# EAGLE board I2CRJ45X8 (EAGLE 9.5.0)
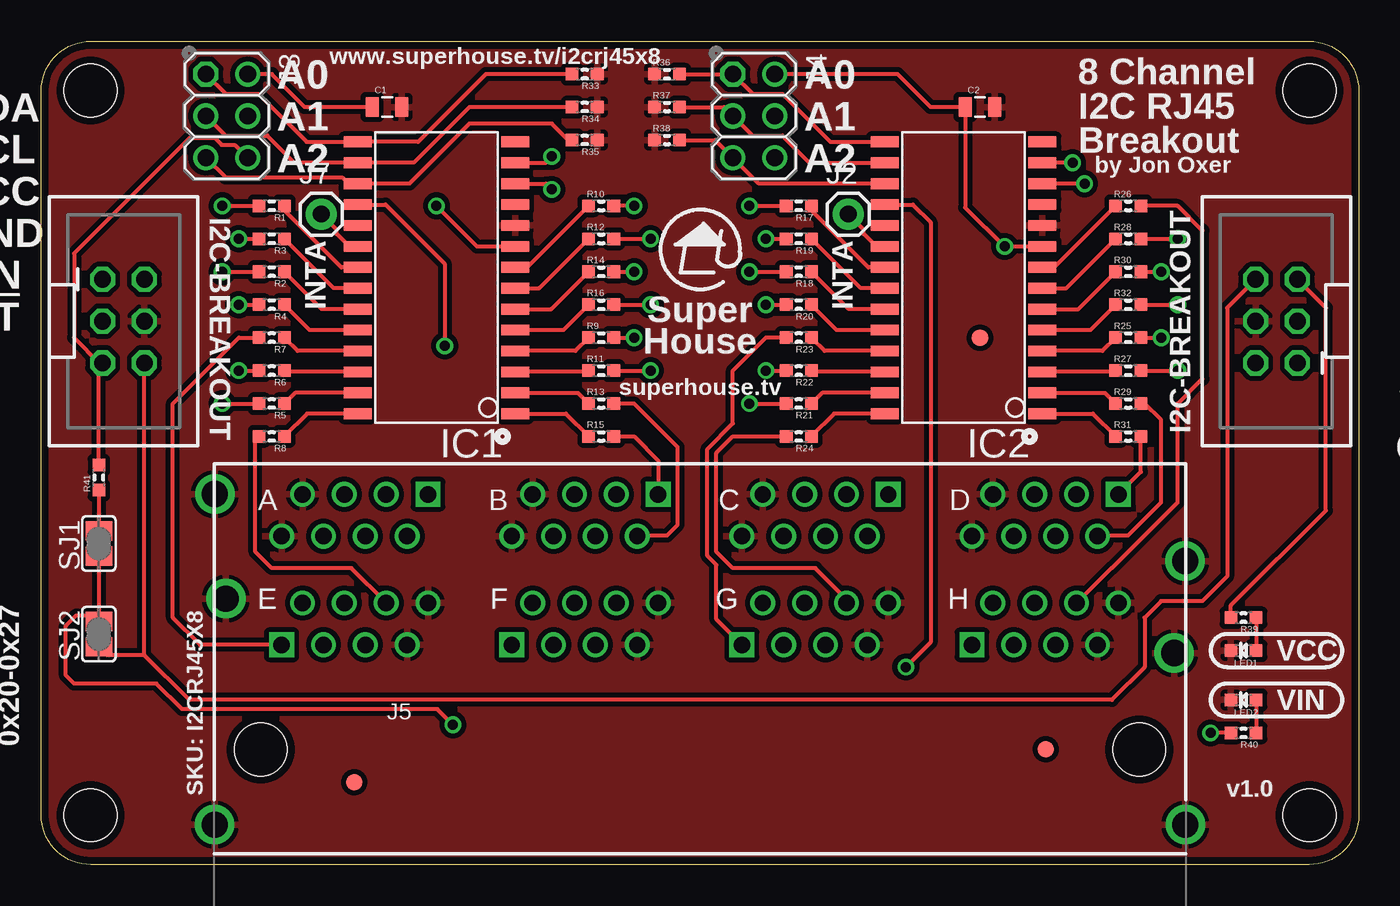
[diagram p0: board, top side]
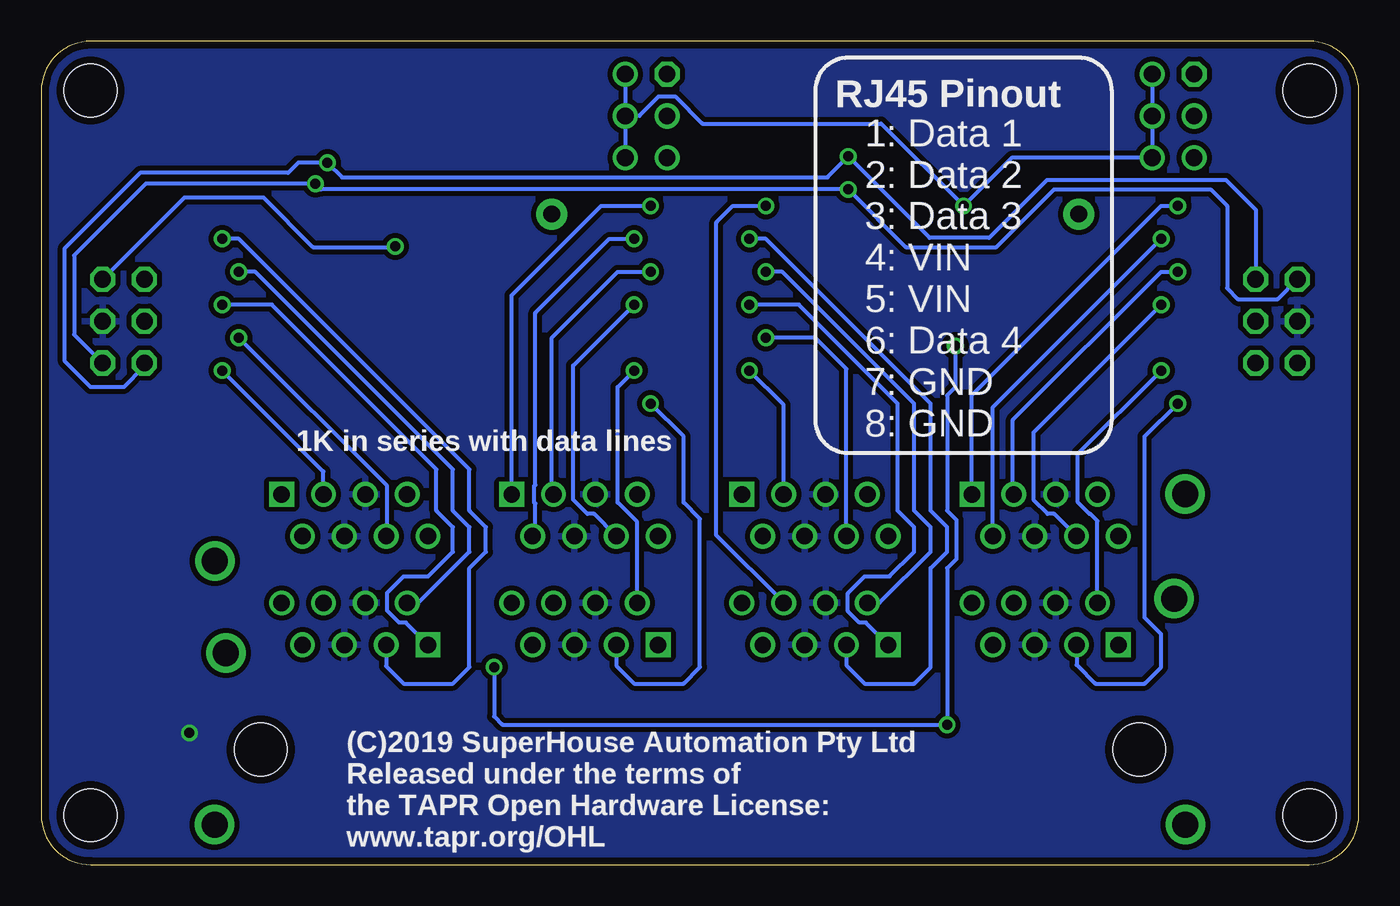
[diagram p1: board, bottom side, seen from below]

Size 80 x 50 mm. Coordinates in mm from the lower left corner, seen from the top.
Outline: 3,0 arc-90 0,3 0,47 arc-90 3,50 77,50 arc-90 80,47 80,3 arc-90 77,0 3,0
Copper layers (1*16): Top 0.035mm / dielectric 1.5mm / Bottom 0.035mm
Design rules "default *": minimum track width 10mil, minimum drill 24mil, track to track 12mil, track to pad 12mil, pad to pad 12mil, via to via 12mil, smd to smd 8mil, copper to edge 18mil, drill to drill 8mil, minimum pad ring 10mil, minimum via ring 8mil, stop-mask expansion 4mil, vias tented up to drill 25mil, thermal gap 10mil
Holes 3.2 mm at 3,3 77,3 77,47 3,47

## Footprints (pad centres in the part's own frame; a part is rotated, then mirrored left to right if it is on the bottom)
C0805 = smd 0.8 x 1.2: 1 -0.9,0; 2 0.9,0
FIDUCIAL-1X2.5 = smd 1 x 1: 1 0,0
SO28W = smd 0.65 x 1.7: 1 -7.62,-4.78; 2 -6.35,-4.78; 3 -5.08,-4.78; 4 -3.81,-4.78; 5 -2.54,-4.78; 6 -1.27,-4.78; 7 0,-4.78; 8 1.27,-4.78; 9 2.54,-4.78; 10 3.81,-4.78; 11 5.08,-4.78; 12 6.35,-4.78; 13 7.62,-4.78; 14 8.89,-4.78; 15 8.89,4.78; 16 7.62,4.78; 17 6.35,4.78; 18 5.08,4.78; 19 3.81,4.78; 20 2.54,4.78; 21 1.27,4.78; 22 0,4.78; 23 -1.27,4.78; 24 -2.54,4.78; 25 -3.81,4.78; 26 -5.08,4.78; 27 -6.35,4.78; 28 -7.62,4.78
2X03-SHROUDED = drill 1.016 octagon: 1 -1.27,2.54; 2 1.27,2.54; 3 -1.27,0; 4 1.27,0; 5 -1.27,-2.54; 6 1.27,-2.54
1X01 = drill 1.016 pad 1.88: 1 0,0
2X03-P = drill 1.016 octagon: 1 0,0 | drill 1.016: 2 0,2.54; 3 2.54,0; 4 2.54,2.54; 5 5.08,0; 6 5.08,2.54
RJ45-2X4 = drill 1 square: A1 -16.51,15.49; B1 -2.54,15.49; C1 11.43,15.49; D1 25.4,15.49; E1 -25.4,6.35; F1 -11.43,6.35; G1 2.54,6.35; H1 16.51,6.35 | drill 1: A2 -17.78,12.95; A3 -19.05,15.49; A4 -20.32,12.95; A5 -21.59,15.49; A6 -22.86,12.95; A7 -24.13,15.49; A8 -25.4,12.95; B2 -3.81,12.95; B3 -5.08,15.49; B4 -6.35,12.95; B5 -7.62,15.49; B6 -8.89,12.95; B7 -10.16,15.49; B8 -11.43,12.95; C2 10.16,12.95; C3 8.89,15.49; C4 7.62,12.95; C5 6.35,15.49; C6 5.08,12.95; C7 3.81,15.49; C8 2.54,12.95; D2 24.13,12.95; D3 22.86,15.49; D4 21.59,12.95; D5 20.32,15.49; D6 19.05,12.95; D7 17.78,15.49; D8 16.51,12.95; E2 -24.13,8.89; E3 -22.86,6.35; E4 -21.59,8.89; E5 -20.32,6.35; E6 -19.05,8.89; E7 -17.78,6.35; E8 -16.51,8.89; F2 -10.16,8.89; F3 -8.89,6.35; F4 -7.62,8.89; F5 -6.35,6.35; F6 -5.08,8.89; F7 -3.81,6.35; F8 -2.54,8.89; G2 3.81,8.89; G3 5.08,6.35; G4 6.35,8.89; G5 7.62,6.35; G6 8.89,8.89; G7 10.16,6.35; G8 11.43,8.89; H2 17.78,8.89; H3 19.05,6.35; H4 20.32,8.89; H5 21.59,6.35; H6 22.86,8.89; H7 24.13,6.35; H8 25.4,8.89 | drill 1.6: GND0 29.464,-4.572; GND1 28.79,5.85; GND2 -29.46,15.5; GND3 -28.79,9.15; GND4 -29.464,-4.572; GND5 29.46,11.43 | hole 3.2: 26.67,0; -26.67,0
LED-0603 = smd 0.762 x 0.762: A -0.762,0; C 0.762,0
R0603 = smd 0.762 x 0.762: 1 -0.762,0; 2 0.762,0
SJ = smd 1.168 x 1.6: 1 -0.762,0; 2 0.762,0
SJC = smd 1.168 x 1.6: 1 -0.762,0; 2 0.762,0

## Placement (x,y rotation side)
C1  10uF  [C0805]  21,46 0 top
C2  10uF  [C0805]  57,46 0 top
FID1  FIDUCIAL1X2.5  [FIDUCIAL-1X2.5]  61,7 0 top
FID2  FIDUCIAL1X2.5  [FIDUCIAL-1X2.5]  19,5 0 top
FID3  FIDUCIAL1X2.5  [FIDUCIAL-1X2.5]  57,32 0 top
IC1  MCP23017SO  [SO28W]  24,35 90 top
IC2  MCP23017SO  [SO28W]  56,35 90 top
J1  M02X3-SHROUDED  [2X03-SHROUDED]  75,33 180 top
J2  INT2A  [1X01]  49,39.5 0 top
J3  M02X3-PIN  [2X03-P]  10,48 270 top
J4  M02X3-PIN  [2X03-P]  42,48 270 top
J5  RJ45-X8  [RJ45-2X4]  40,7 0 top
J6  M02X3-SHROUDED  [2X03-SHROUDED]  5,33 0 top
J7  INT1A  [1X01]  17,39.5 0 top
LED1  BLUE  [LED-0603]  73,13 180 top
LED2  GREEN  [LED-0603]  73,10 180 top
R1  1K  [R0603]  14,40 180 top
R2  1K  [R0603]  14,36 180 top
R3  1K  [R0603]  14,38 180 top
R4  1K  [R0603]  14,34 180 top
R5  1K  [R0603]  14,28 180 top
R6  1K  [R0603]  14,30 180 top
R7  1K  [R0603]  14,32 180 top
R8  1K  [R0603]  14,26 180 top
R9  1K  [R0603]  34,32 0 top
R10  1K  [R0603]  34,40 0 top
R11  1K  [R0603]  34,30 0 top
R12  1K  [R0603]  34,38 0 top
R13  1K  [R0603]  34,28 0 top
R14  1K  [R0603]  34,36 0 top
R15  1K  [R0603]  34,26 0 top
R16  1K  [R0603]  34,34 0 top
R17  1K  [R0603]  46,40 180 top
R18  1K  [R0603]  46,36 180 top
R19  1K  [R0603]  46,38 180 top
R20  1K  [R0603]  46,34 180 top
R21  1K  [R0603]  46,28 180 top
R22  1K  [R0603]  46,30 180 top
R23  1K  [R0603]  46,32 180 top
R24  1K  [R0603]  46,26 180 top
R25  1K  [R0603]  66,32 0 top
R26  1K  [R0603]  66,40 0 top
R27  1K  [R0603]  66,30 0 top
R28  1K  [R0603]  66,38 0 top
R29  1K  [R0603]  66,28 0 top
R30  1K  [R0603]  66,36 0 top
R31  1K  [R0603]  66,26 0 top
R32  1K  [R0603]  66,34 0 top
R33  10K  [R0603]  33,48 180 top
R34  10K  [R0603]  33,46 180 top
R35  10K  [R0603]  33,44 180 top
R36  10K  [R0603]  38,48 0 top
R37  10K  [R0603]  38,46 0 top
R38  10K  [R0603]  38,44 0 top
R39  10K  [R0603]  73,15 180 top
R40  10K  [R0603]  73,8 180 top
R41  10K  [R0603]  3.5,23.5 90 top
SJ1  [SJ]  3.5,19.5 90 top
SJ2  SJC-NORMAL  [SJC]  3.5,14 90 top

## Library data of the parts
C1 C2 R1-R41 = SuperHouse-DiscreteSemi
FID1-FID3 = SuperHouse-Symbols
IC1 IC2 = SuperHouse-ICs
J1-J7 = SuperHouse-Connectors
LED1 LED2 = SuperHouse-LEDs
SJ1 SJ2 = SuperHouse-Jumpers

## Nets
!RESET: J1.6 J6.6 SJ2.1
!RST: IC1.18 IC2.18 SJ1.1 SJ2.2
A1: J5.A1 R1.2
A2: J5.A2 R3.2
A3: J5.A3 R2.2
A6: J5.A6 R4.2
B1: J5.B1 R15.2
B2: J5.B2 R13.2
B3: J5.B3 R11.2
B6: J5.B6 R9.2
C1: J5.C1 R17.2
C2: J5.C2 R19.2
C3: J5.C3 R18.2
C6: J5.C6 R20.2
D1: J5.D1 R31.2
D2: J5.D2 R29.2
D3: J5.D3 R27.2
D6: J5.D6 R25.2
E1: J5.E1 R7.2
E2: J5.E2 R6.2
E3: J5.E3 R5.2
E6: J5.E6 R8.2
F1: J5.F1 R16.2
F2: J5.F2 R14.2
F3: J5.F3 R12.2
F6: J5.F6 R10.2
G1: J5.G1 R23.2
G2: J5.G2 R22.2
G3: J5.G3 R21.2
G6: J5.G6 R24.2
GND: C1.2 C2.2 IC1.10 IC2.10 J1.4 J5.A7 J5.A8 J5.B7 J5.B8 J5.C7 J5.C8 J5.D7 J5.D8 J5.E7 J5.E8 J5.F7 J5.F8 J5.G7 J5.G8 J5.GND0 J5.GND1 J5.GND2 J5.GND3 J5.GND4 J5.GND5 J5.H7 J5.H8 J6.4 LED1.C LED2.C R33.1 R34.1 R35.1 R36.1 R37.1 R38.1
GPA0: IC1.21 R1.1
GPA0-2: IC2.21 R17.1
GPA1: IC1.22 R3.1
GPA1-2: IC2.22 R19.1
GPA2: IC1.23 R2.1
GPA2-2: IC2.23 R18.1
GPA3: IC1.24 R4.1
GPA3-2: IC2.24 R20.1
GPA4: IC1.25 R7.1
GPA4-2: IC2.25 R23.1
GPA5: IC1.26 R6.1
GPA5-2: IC2.26 R22.1
GPA6: IC1.27 R5.1
GPA6-2: IC2.27 R21.1
GPA7: IC1.28 R8.1
GPA7-2: IC2.28 R24.1
GPB0: IC1.1 R15.1
GPB0-2: IC2.1 R31.1
GPB1: IC1.2 R13.1
GPB1-2: IC2.2 R29.1
GPB2: IC1.3 R11.1
GPB2-2: IC2.3 R27.1
GPB3: IC1.4 R9.1
GPB3-2: IC2.4 R25.1
GPB4: IC1.5 R16.1
GPB4-2: IC2.5 R32.1
GPB5: IC1.6 R14.1
GPB5-2: IC2.6 R30.1
GPB6: IC1.7 R12.1
GPB6-2: IC2.7 R28.1
GPB7: IC1.8 R10.1
GPB7-2: IC2.8 R26.1
H1: J5.H1 R32.2
H2: J5.H2 R30.2
H3: J5.H3 R28.2
H6: J5.H6 R26.2
N$1: IC2.16 J4.3 R37.2
N$2: IC1.17 J3.5 R35.2
N$3: IC1.16 J3.3 R34.2
N$4: IC1.15 J3.1 R33.2
N$5: IC2.15 J4.1 R36.2
N$6: IC2.17 J4.5 R38.2
N$7: LED1.A R39.1
N$8: LED2.A R40.1
N$9: IC2.20 J2.1
N$10: IC1.20 J7.1
N$14: R41.1 SJ1.2
SCL: IC1.12 IC2.12 J1.1 J6.1
SDA: IC1.13 IC2.13 J1.2 J6.2
VCC: C1.1 C2.1 IC1.9 IC2.9 J1.5 J3.2 J3.4 J3.6 J4.2 J4.4 J4.6 J6.5 R39.2 R41.2
VIN: J1.3 J5.A4 J5.A5 J5.B4 J5.B5 J5.C4 J5.C5 J5.D4 J5.D5 J5.E4 J5.E5 J5.F4 J5.F5 J5.G4 J5.G5 J5.H4 J5.H5 J6.3 R40.2

## Tracks (layer width: path | path; a pad name or v marks a point on that pad's centre or on a via)
!RESET
  Top 0.254: J1.6 72,33.81 72,17.5 70.5,16 68,16 67,15 67,12 65,10 9,10 6.27,12.73 | 6.27,12.73 J6.6 | SJ2.1 4.01,12.73 6.27,12.73
!RST  (via drill 0.61)
  Top 0.254: SJ1.1 3.5,15.14 | 3.5,15.14 SJ2.2 | IC1.18 20.92,40.08 24.5,36.5 v24.5,31.5 | v25,8.5 24.06,9.44 8.56,9.44 7,11 2,11 1.5,11.5 1.5,14.5 2.14,15.14 3.5,15.14 | IC2.18 52.92,40.08 54,39 54,13.5 v52.5,12
  Bottom 0.254: v24.5,31.5 24.5,29 25,28.5 25,21.5 24.44,20.94 24.44,18.56 25,18 v25,8.5 52,8.5 52.5,9 v52.5,12
A1  (via drill 0.61)
  Top 0.254: v11,40 R1.2
  Bottom 0.254: J5.A1 23.49,28.51 12,40 v11,40
A2  (via drill 0.61)
  Top 0.254: v12,38 R3.2
  Bottom 0.254: J5.A2 22.22,27.78 v12,38
A3  (via drill 0.61)
  Top 0.254: v11,36 R2.2
  Bottom 0.254: J5.A3 21,22.54 21,27 12,36 v11,36
A6  (via drill 0.61)
  Top 0.254: v12,34 R4.2
  Bottom 0.254: J5.A6 18.49,21.3 18.9,21.3 19.76,22.17 19.76,26.24 v12,34
B1
  Top 0.254: R15.2 36,26 37.46,24.54 J5.B1
B2
  Top 0.254: J5.B2 36.24,20 38,20 38.65,20.65 38.65,25.35 36,28 R13.2
B3  (via drill 0.61)
  Top 0.254: R11.2 v37,30
  Bottom 0.254: J5.B3 34.92,27.92 v37,30
B6  (via drill 0.61)
  Top 0.254: R9.2 v36,32
  Bottom 0.254: J5.B6 31.11,30.11 33,32 v36,32
C1  (via drill 0.61)
  Top 0.254: v43,40 R17.2
  Bottom 0.254: J5.C1 51.43,34.57 46,40 v43,40
C2  (via drill 0.61)
  Top 0.254: v44,38 R19.2
  Bottom 0.254: J5.C2 50,20.11 50,21.92 50.08,22 50.08,22.98 50,23.06 50,33.5 45.5,38 v44,38
C3  (via drill 0.61)
  Top 0.254: v43,36 R18.2
  Bottom 0.254: J5.C3 49,22.6 49,32 45,36 v43,36
C6  (via drill 0.61)
  Top 0.254: v44,34 R20.2
  Bottom 0.254: J5.C6 46.43,21.3 46.84,21.3 47.7,22.17 47.7,30.3 v44,34
D1
  Top 0.254: J5.D1 66.76,23.85 R31.2
D2
  Top 0.254: J5.D2 64.18,20 66,20 68,22 68,27 67,28 R29.2
D3  (via drill 0.61)
  Top 0.254: R27.2 v69,30
  Bottom 0.254: J5.D3 62.86,23.86 v69,30
D6  (via drill 0.61)
  Top 0.254: R25.2 v68,32
  Bottom 0.254: J5.D6 59,20 59,23 v68,32
E1
  Top 0.254: J5.E1 9.65,13.35 8,15 8,28 12,32 R7.2
E2  (via drill 0.61)
  Top 0.254: v12,30 R6.2
  Bottom 0.254: J5.E2 15.87,20.87 16.3,21.3 16.36,21.3 17.06,22 17.06,24.94 v12,30
E3  (via drill 0.61)
  Top 0.254: v11,28 R5.2
  Bottom 0.254: J5.E3 17.14,12.14 16,11 13,11 12,12 12,14 13,15 13,26 v11,28
E6
  Top 0.254: J5.E6 18.84,18 14,18 13,19 13,25.76 R8.2
F1  (via drill 0.61)
  Top 0.254: R16.2 v37,34
  Bottom 0.254: J5.F1 29.92,14.7 30.33,14.7 31.03,15.4 31.03,16.47 30,17.5 28.5,17.5 27,19 27,20.5 28,21.5 28,28 34,34 v37,34
F2  (via drill 0.61)
  Top 0.254: R14.2 v36,36
  Bottom 0.254: J5.F2 29.11,15.89 26,19 26,20.5 27,21.5 27,28 35,36 v36,36
F3  (via drill 0.61)
  Top 0.254: R12.2 v37,38
  Bottom 0.254: J5.F3 31.11,12.11 30,11 27,11 26,12 26,18 25,19 25,20.5 26,21.5 26,28 36,38 v37,38
F6  (via drill 0.61)
  Top 0.254: v36,40 R10.2
  Bottom 0.254: J5.F6 34.92,15.92 39,20 39,39 38,40 v36,40
G1
  Top 0.254: R23.2 44,32 42,30 42,26.79 40.44,25.23 40.44,18.77 41,18.21 41,14.89 J5.G1
G2  (via drill 0.61)
  Top 0.254: v44,30 R22.2
  Bottom 0.254: J5.G2 43.81,20.81 45,22 45,29 v44,30
G3  (via drill 0.61)
  Top 0.254: v43,28 R21.2
  Bottom 0.254: J5.G3 45.08,12.08 44,11 41,11 40,12 40,21 41,22 41,26 v43,28
G6
  Top 0.254: J5.G6 48.89,16.11 47,18 42,18 41,19 41,25 42,26 R24.2
GND
  pour Top: 77,0 arc90 80,3 80,47 arc90 77,50 3,50 arc90 0,47 0,3 arc90 3,0
GPA0
  Top 0.254: IC1.21 18.23,36.27 14.76,39.74 R1.1
GPA0-2
  Top 0.254: IC2.21 50.23,36.27 46.76,39.74 R17.1
GPA1
  Top 0.254: IC1.22 17.76,35 R3.1
GPA1-2
  Top 0.254: IC2.22 49.76,35 R19.1
GPA2
  Top 0.254: IC1.23 17.03,33.73 R2.1
GPA2-2
  Top 0.254: IC2.23 49.03,33.73 R18.1
GPA3
  Top 0.254: R4.1 16.3,32.46 IC1.24
GPA3-2
  Top 0.254: R20.1 48.3,32.46 IC2.24
GPA4
  Top 0.254: R7.1 15.57,31.19 IC1.25
GPA4-2
  Top 0.254: R23.1 47.57,31.19 IC2.25
GPA5
  Top 0.254: IC1.26 14.84,29.92 R6.1
GPA5-2
  Top 0.254: IC2.26 46.84,29.92 R22.1
GPA6
  Top 0.254: IC1.27 15.41,28.65 R5.1
GPA6-2
  Top 0.254: IC2.27 47.41,28.65 R21.1
GPA7
  Top 0.254: IC1.28 16.14,27.38 R8.1
GPA7-2
  Top 0.254: IC2.28 48.14,27.38 R24.1
GPB0
  Top 0.254: IC1.1 31.86,27.38 R15.1
GPB0-2
  Top 0.254: IC2.1 63.86,27.38 R31.1
GPB1
  Top 0.254: IC1.2 32.59,28.65 R13.1
GPB1-2
  Top 0.254: IC2.2 64.59,28.65 R29.1
GPB2
  Top 0.254: R11.1 33.16,29.92 IC1.3
GPB2-2
  Top 0.254: R27.1 65.16,29.92 IC2.3
GPB3
  Top 0.254: R9.1 32.43,31.19 IC1.4
GPB3-2
  Top 0.254: R25.1 64.43,31.19 IC2.4
GPB4
  Top 0.254: R16.1 31.7,32.46 IC1.5
GPB4-2
  Top 0.254: R32.1 63.7,32.46 IC2.5
GPB5
  Top 0.254: IC1.6 30.97,33.73 R14.1
GPB5-2
  Top 0.254: IC2.6 62.97,33.73 R30.1
GPB6
  Top 0.254: IC1.7 30.24,35 R12.1
GPB6-2
  Top 0.254: IC2.7 62.24,35 R28.1
GPB7
  Top 0.254: IC1.8 29.51,36.27 R10.1
GPB7-2
  Top 0.254: IC2.8 61.51,36.27 R26.1
H1  (via drill 0.61)
  Top 0.254: R32.2 v69,34
  Bottom 0.254: J5.H1 57.86,14.7 58.27,14.7 59,15.43 59,16.5 58,17.5 56.5,17.5 55,19 55,20.5 56,21.5 56,24 66,34 v69,34
H2  (via drill 0.61)
  Top 0.254: R30.2 v68,36
  Bottom 0.254: J5.H2 57.11,15.89 54,19 54,20.5 55,21.5 55,24 67,36 v68,36
H3  (via drill 0.61)
  Top 0.254: R28.2 v69,38
  Bottom 0.254: J5.H3 59.05,12.05 58,11 55,11 54,12 54,18 53,19 53,20.5 54,21.5 54,24 68,38 v69,38
H6
  Top 0.254: J5.H6 64.97,18 65,18 69,22 69,28 70.5,29.5 70.5,38.5 69,40 R26.2
N$1
  Top 0.254: IC2.16 46.65,42.62 45,44.27 43.19,44.27 J4.3 41.46,46 R37.2
N$2
  Top 0.254: R35.2 32,44 31,45 26,45 22.35,41.35 IC1.17 18.65,41.35 18.27,41.73 11.19,41.73 J3.5
N$3
  Top 0.254: J3.3 11.19,44.27 13.73,44.27 15.38,42.62 IC1.16 22.62,42.62 26,46 R34.2
N$4
  Top 0.254: J3.1 11.19,46.81 13.19,46.81 16.11,43.89 IC1.15 22.89,43.89 27,48 R33.2
N$5
  Top 0.254: IC2.15 47.92,43.89 45,46.81 43.19,46.81 J4.1 R36.2
N$6
  Top 0.254: IC2.17 43.57,41.35 J4.5 40.92,44 R38.2
N$7
  Top 0.254: R39.1 LED1.A
N$8
  Top 0.254: LED2.A R40.1
N$9
  Top 0.254: IC2.20 50.7,37.54 49.94,38.31 49.94,38.56 J2.1
N$10
  Top 0.254: J7.1 17.94,38.56 17.94,38.31 18.7,37.54 IC1.20
N$14
  Top 0.254: R41.1 SJ1.2
SCL  (via drill 0.61)
  Top 0.254: v63.35,41.35 IC2.12 | IC1.12 30.65,41.35 v31,41
  Bottom 0.254: J1.1 78,32.19 78,37 73.65,41.35 v63.35,41.35 63,41 v31,41 27.5,37.5 22,37.5 19.5,40 18.5,41 9,41 8,40 8,35 7.35,34.35 4.92,34.35 J6.1
SDA  (via drill 0.61)
  Top 0.254: v62.62,42.62 IC2.13 | IC1.13 30.62,42.62 v31,43
  Bottom 0.254: J1.2 73.73,30.27 75,29 77,29 78.56,30.56 78.56,37.44 74,42 65,42 64.38,42.62 v62.62,42.62 61.73,41.73 32.27,41.73 v31,43 26.06,38.06 22.44,38.06 18.94,41.56 8.06,41.56 6.27,39.77 J6.2
VCC  (via drill 0.61)
  Top 0.254: IC1.9 26.46,37.54 v24,40 23.92,40.08 | IC2.9 v58.5,37.54 58.46,37.54 56.1,39.9 C2.1 54,46 52,48 J4.2 | J3.2 14,48 16,46 C1.1 | J3.6 11.75,43.71 10.96,43.71 10.56,44.11 9,44.11 2,37.11 2,32 3.54,30.46 J6.5 3.5,30.23 R41.2 | R39.2 72.24,15.74 78,21.5 78,33.81 J1.5
  Bottom 0.254: J3.2 J3.4 J3.6 21.08,42.92 v24,40 29,45 39.85,45 41.51,46.65 42.49,46.65 43.69,45.46 44,45.46 44.54,46 | J4.2 44.54,46 | 44.54,46 J4.4 J4.6 | v58.5,37.54 58.5,37.5 63.5,37.5 66.5,40.5 71.31,40.5 J1.5
VIN  (via drill 0.61)
  Top 0.254: R40.2 v71,8
  pour Bottom: 77,0 arc90 80,3 80,47 arc90 77,50 3,50 arc90 0,47 0,3 arc90 3,0

## Text on the board
tPlace: www.superhouse.tv/i2crj45x8 | A0 | A0 | SDA | A1 | A1 | SCL | A2 | A2 | 8 Channel / I2C RJ45 / Breakout | by Jon Oxer | VCC | I2C-BREAKOUT | GND | VIN | INTA | INTA | !INT | SDA | Super / House | SCL | superhouse.tv | VCC | I2C-BREAKOUT | GND | VIN | !INT | VCC | VIN | VCC:1.8-5.5V / VIN:12V / I2C Addr: / 0x20-0x27 | SKU: I2CRJ45X8 | v1.0
bPlace: RJ45 Pinout | 1: Data 1 / 2: Data 2 / 3: Data 3 / 4: VIN / 5: VIN / 6: Data 4 / 7: GND / 8: GND | 1K in series with data lines | (C)2019 SuperHouse Automation Pty Ltd / Released under the terms of / the TAPR Open Hardware License: / www.tapr.org/OHL